# Altium PCB main.PcbDoc (part 1 of 2)
Units mil, origin at the board's own origin, x right, y up, seen from the top; angles counter-clockwise.
Board outline 5610.24 x 2755.91 mil, 4 copper layers (Top Layer, Int1 (GND), Int2 (PWR), Bottom Layer), stack 53.912 mil thick; 103 components, 58 nets, 279 pads, 77 vias.
Unrouted connection lines stored in the file: 2.
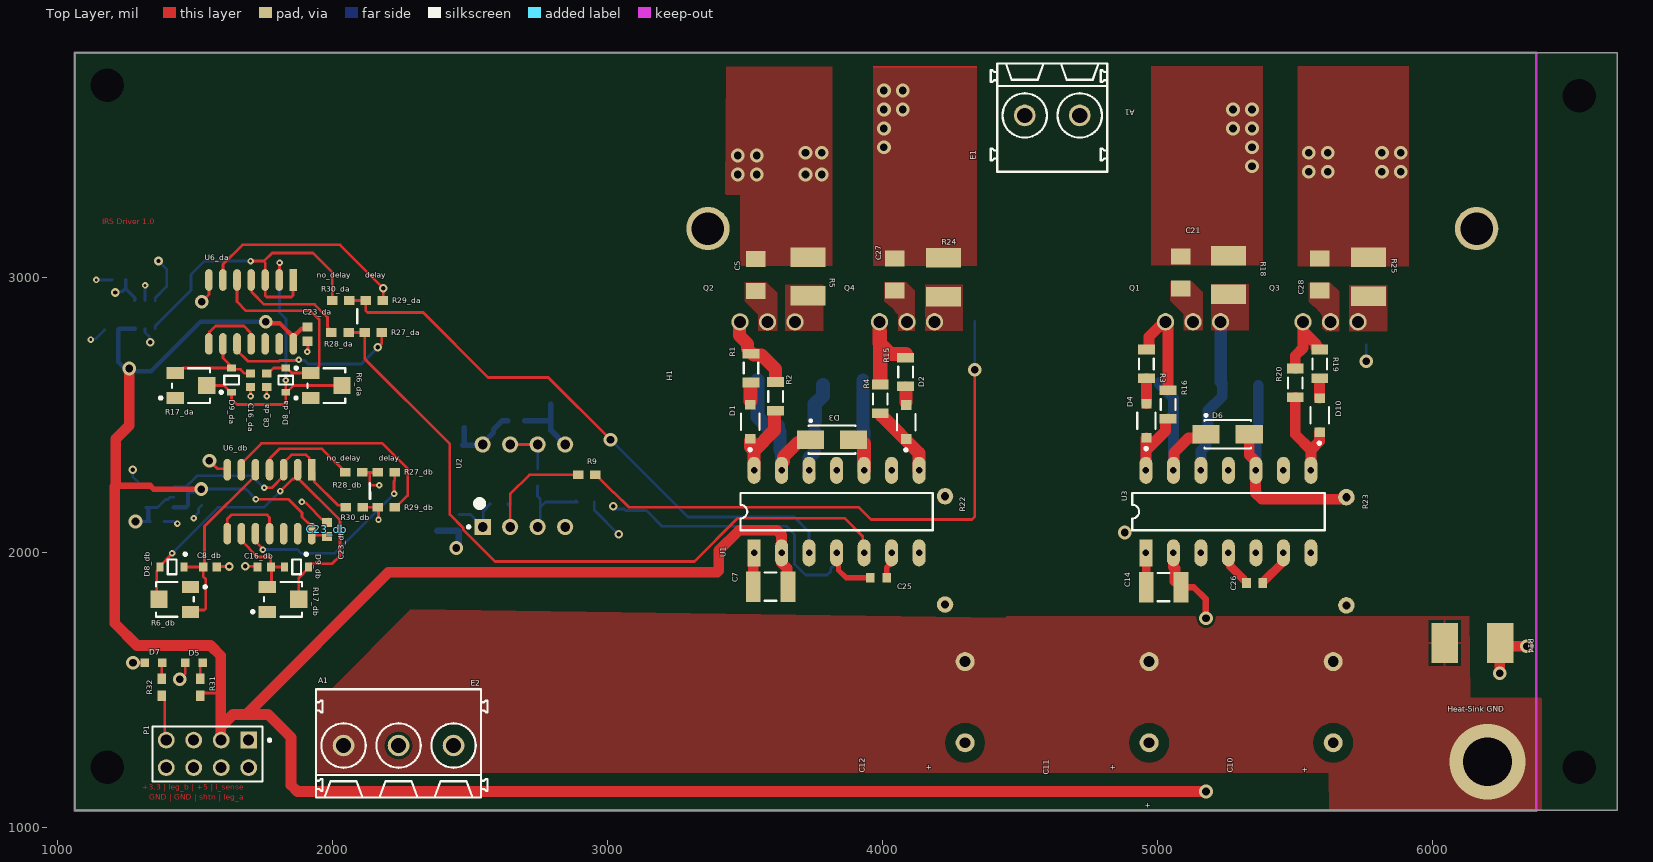
[diagram p0: Top Layer view]
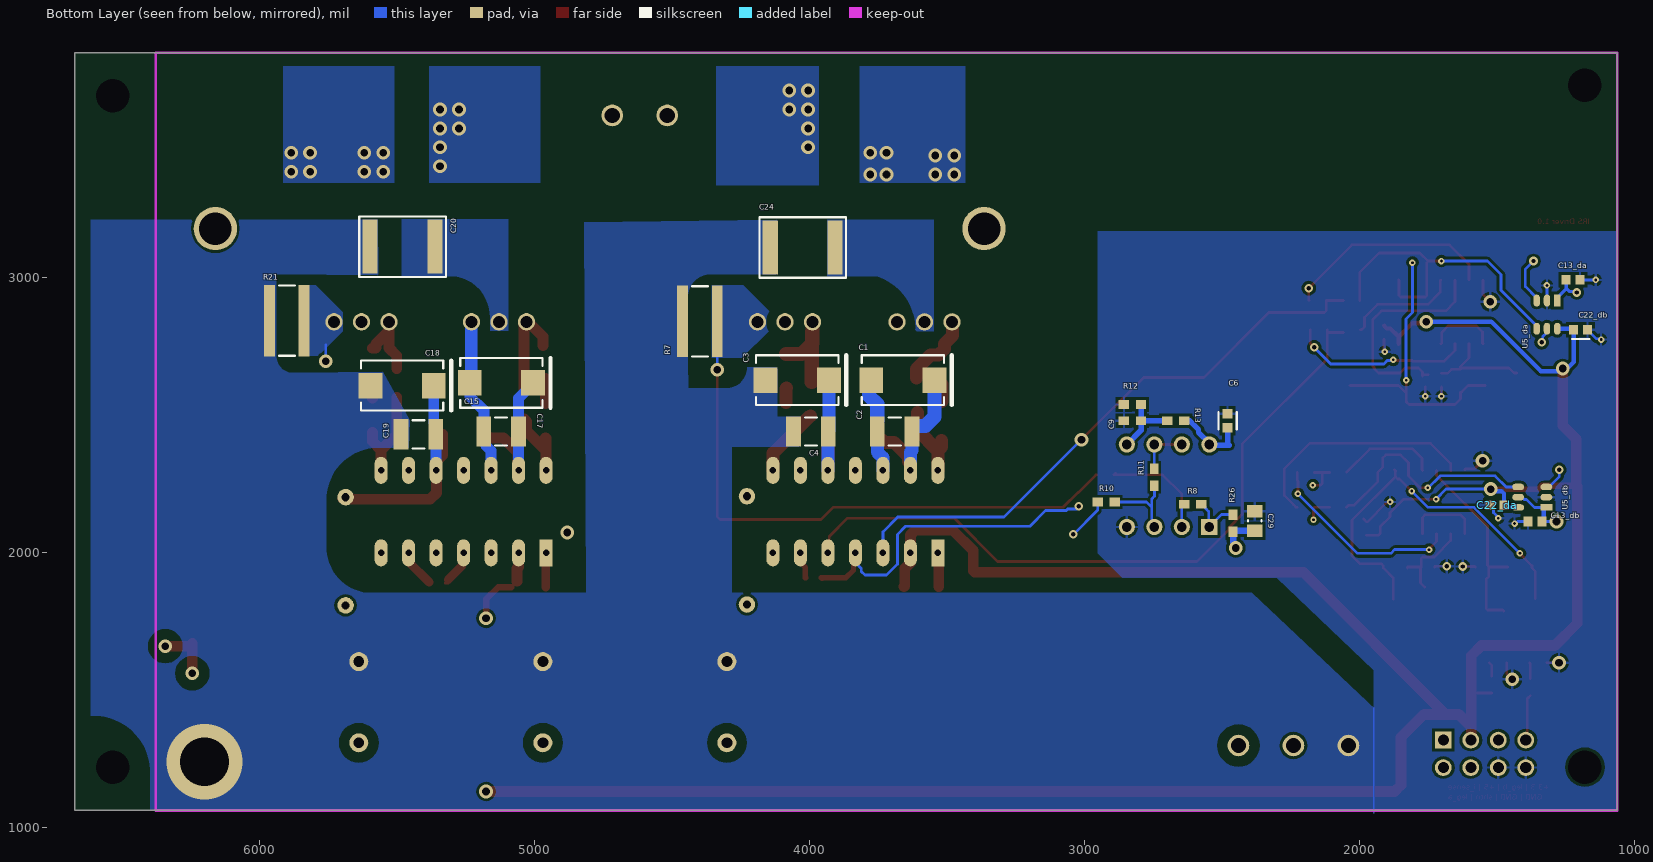
[diagram p1: Bottom Layer view, seen from below]
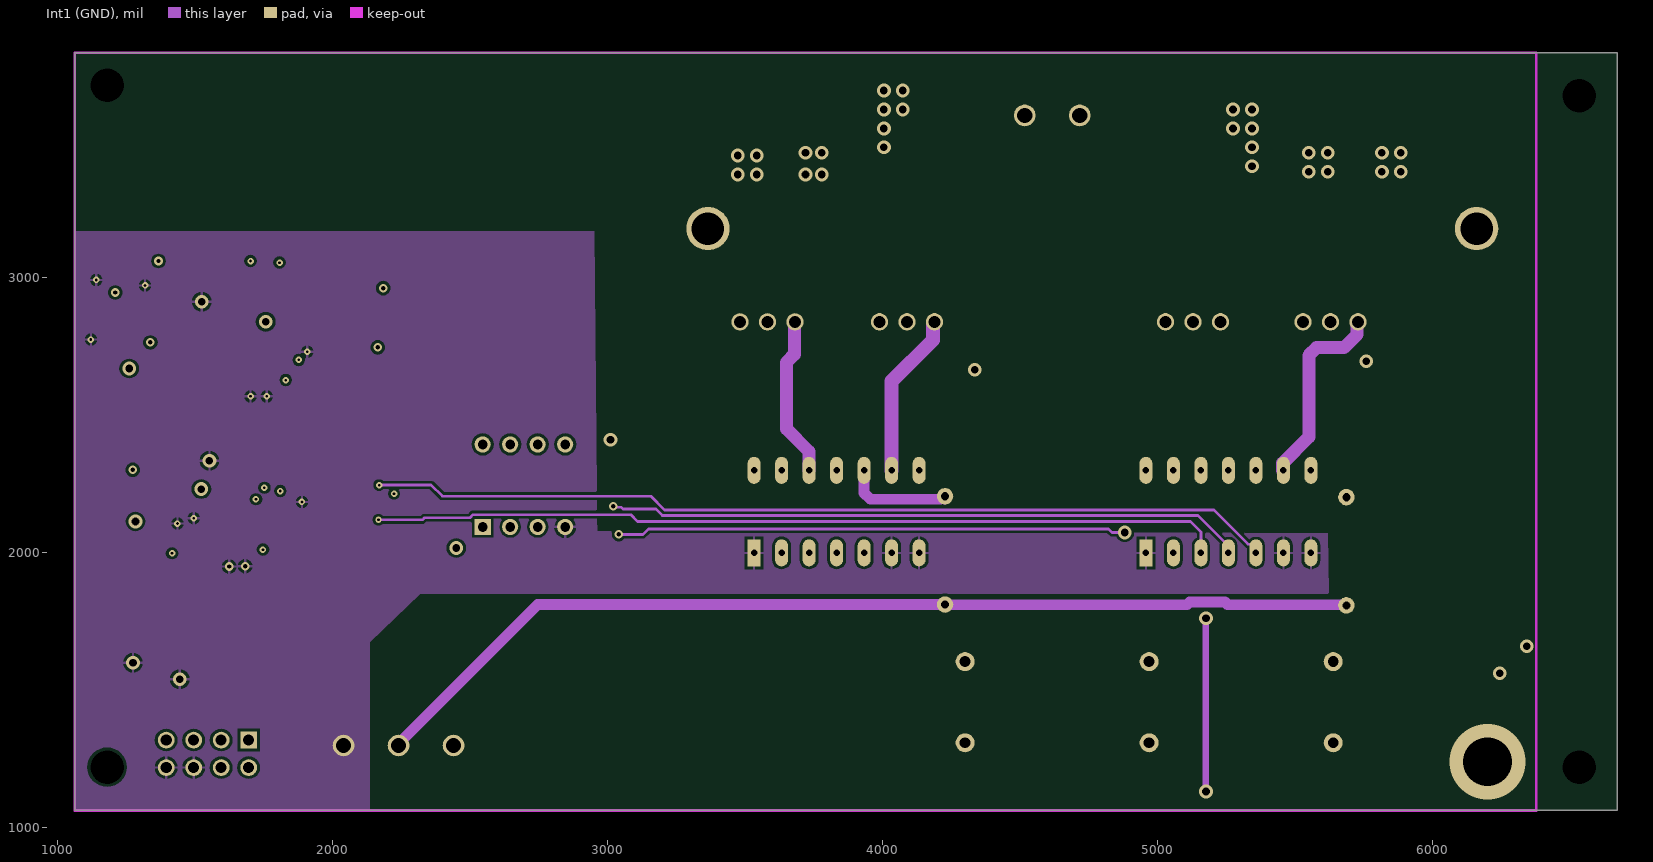
[diagram p2: Int1 (GND)]
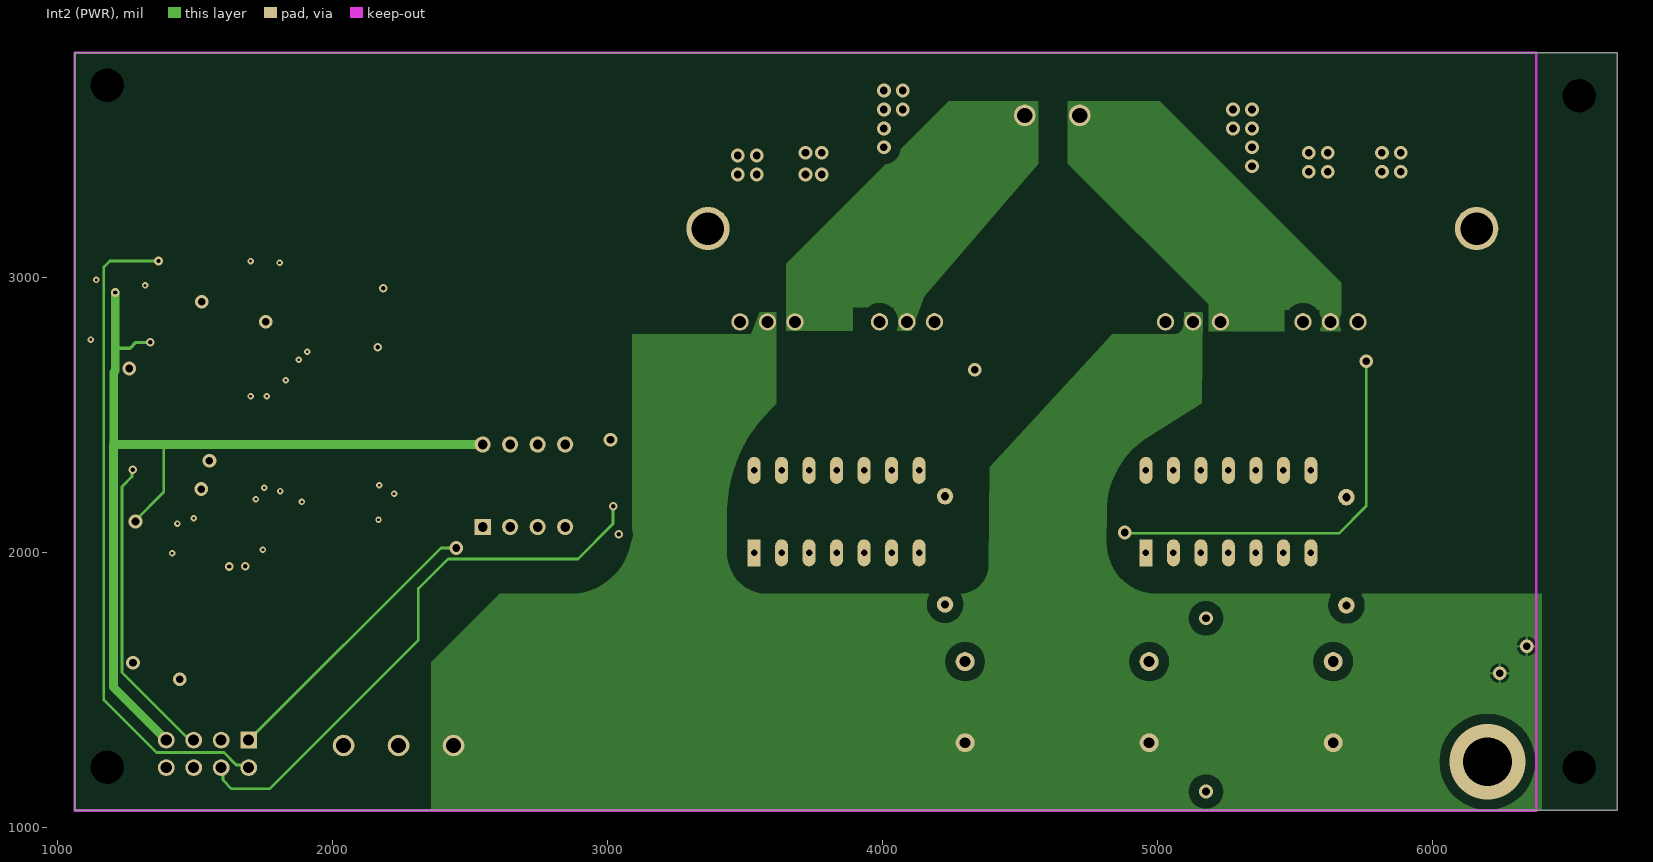
[diagram p3: Int2 (PWR)]

## Layer stack, top to bottom
Top Solder: solder mask 1, SM-001, Dk 4
Top Layer: signal copper 1.378
Dielectric 1: prepreg 5.1, PP-017, Dk 4.3
Dielectric 2: prepreg 5.1, PP-017, Dk 4.3
Int1 (GND): signal copper 1.378
Dielectric 3: core 28, Core-039, Dk 4.8
Int2 (PWR): signal copper 1.378
Dielectric 4: prepreg 5.1, PP-017, Dk 4.3
Dielectric 5: prepreg 5.1, PP-017, Dk 4.3
Bottom Layer: signal copper 1.378
Bottom Solder: solder mask 1, SM-001, Dk 4

## Board outline
1062.99,1062.99 6673.23,1062.99 6673.23,3818.9 1062.99,3818.9

## Design rules (kind name [scope] priority, off if disabled: settings)
Clearance vhigh [InNetClass('vhigh') vs Not InNetClass('vhigh')] p1: gap=37.01 ignorepadtopadclearanceinfootprint=FALSE
Clearance [All] p2: gap=10 ignorepadtopadclearanceinfootprint=FALSE except(0: Arc-Hole Track-Hole SMDPad-Hole THPad-Hole Via-Hole Fill-Hole Poly-Hole Region-Hole Text-Hole)
MinimumSolderMaskSliver [All] p1: minsoldermaskwidth=3.94
PlaneConnect direct_connect [InPadClass('direct_connect')] p1: planeconnectstyle=Direct reliefexpansion=20 reliefentries=4 reliefconductorwidth=10 reliefairgap=10
PlaneConnect [All] p2: planeconnectstyle=Relief reliefexpansion=20 reliefentries=4 reliefconductorwidth=10 reliefairgap=10
PolygonConnect direct_connect_1 [InPadClass('direct_connect')] p1: connectstyle=Direct reliefconductorwidth=10 reliefentries=4 polygonreliefangle="90 Angle" airgapwidth=10
PolygonConnect [All] p2: connectstyle=Relief reliefconductorwidth=10 reliefentries=4 polygonreliefangle="90 Angle" airgapwidth=10
RoutingVias [All] p1: holewidth=15.75 width=31.5 viastyle="Through Hole" minholewidth=9.84 minwidth=23.62 maxholewidth=39.37 maxwidth=51.18
SilkToSilkClearance [All] p1: silktosilkclearance=0.39
SilkToSolderMaskClearance [IsPad] p1: minsilkscreentomaskgap=3.94 clearancetoexposedcopper=TRUE
SolderMaskExpansion [All] p1: expansion=4 istentingtop=FALSE
Width [All] p1: maxlimit=100 minlimit=10 preferedwidth=10
26 further rules are at their usual default settings.

## Classes and differential pairs
channel class turn_on_delay: da db
component class db: C8_db C13_db C16_db C22_db C23_db D8_db D9_db R6_db R17_db R27_db R28_db R29_db R30_db U5_db U6_db
component class da: C8_da C13_da C16_da C22_da C23_da D8_da D9_da R6_da R17_da R27_da R28_da R29_da R30_da U5_da U6_da
net class vhigh: NetC1_1 NetC1_2 NetC15_1 NetC15_2 NetD1_1 NetD1_2 NetD4_1 NetD4_2 NetQ1_G NetQ2_G VH
pad class direct_connect: C3-1 C3-2 C4-1 C4-2 C5-1 C5-2 C10-1 C10-2 C11-1 C11-2 C12-1 C12-2 C18-1 C18-2 C19-1 C19-2 C20-1 C20-2 C21-1 C21-2 C24-1 C24-2 C27-1 C27-2 C28-1 C28-2 E1-A1 E1-A2 E2-A1 E2-A2 E2-A3 Q1-D Q1-G Q1-S Q2-D Q2-G Q2-S Q3-D Q3-G Q3-S Q4-D Q4-G Q4-S R2-1 R2-2 R5-1 R5-2 R7-1 R7-2 R18-1 R18-2 R21-1 R21-2 R24-1 R24-2 R25-1 R25-2
component class main: C1 C2 C3 C4 C5 C6 C7 C9 C10 C11 C12 C14 C15 C17 C18 C19 C20 C21 C24 C25 C26 C27 C28 C29 D1 D2 D3 D4 D5 D6 D7 D10 E1 E2 H1 P1 Q1 Q2 Q3 Q4 R1 R2 R3 R4 R5 R7 R8 R9 R10 R11 R12 R13 R14 R15 R16 R18 R19 R20 R21 R22 R23 R24 R25 R26 R31 R32 U1 U2 U3

## Components (designator, comment, footprint, x,y, rotation, side; value= is the part's Value field where it differs from the comment)
C1 "22uF" KEMT-D-7343-31-2_L 3661.43,2627.95 r0 bottom
C2 "3.3uF 25V" CAPC1210(3225)170_M 3690.96,2440.94 r180 bottom value=3.3uF
C3 "22uF" KEMT-D-7343-31-2_L 4045.29,2627.95 r0 bottom
C4 "3.3uF 25V" CAPC1210(3225)170_M 3996.08,2440.94 r180 bottom value=3.3uF
C5 "10nF 100V" 1206 3540.13,3010.69 r90 top
C6 "C0603X104K5RACTU" FP-C0603-CJ-MFG 2480.32,2480.32 r90 bottom value=100nF
C7 "3.3uF 25V" CAPC1210(3225)170_M 3594.02,1877.02 r0 top value=3.3uF
C8_da "GRM1885C1H100JA01D" CAPC1608X90X35LL10T15 1761.81,2627.95 r90 top (schematic designator C8)
C8_db "GRM1885C1H100JA01D" CAPC1608X90X35LL10T15 1555.12,1948.82 r180 top (schematic designator C8)
C9 "100nF" 0805 2795.28,2539.37 r0 bottom
C10 "330uF 150V" cap_electrolyte 5639.78,1456.69 r90 top locked
C11 "330uF 150V" cap_electrolyte 4970.49,1456.69 r90 top locked
C12 "330uF 150V" cap_electrolyte 4301.2,1456.69 r90 top locked
C13_da "C0603X104K5RACTU" FP-C0603-CJ-MFG 1224.16,2993 r180 bottom value=100nF (schematic designator C13)
C13_db "C0603X104K5RACTU" FP-C0603-CJ-MFG 1362.2,2114.17 r0 bottom value=100nF (schematic designator C13)
C14 "3.3uF 25V" CAPC1210(3225)170_M 5023.3,1875.06 r0 top value=3.3uF
C15 "22uF" KEMT-D-7343-31-2_L 5121.06,2618.11 r0 bottom
C16_da "GRM1885C1H100JA01D" CAPC1608X90X35LL10T15 1702.76,2627.95 r90 top (schematic designator C16)
C16_db "GRM1885C1H100JA01D" CAPC1608X90X35LL10T15 1751.97,1948.82 r0 top (schematic designator C16)
C17 "3.3uF 25V" CAPC1210(3225)170_M 5122.05,2440.94 r180 bottom value=3.3uF
C18 "22uF" KEMT-D-7343-31-2_L 5482.28,2608.27 r0 bottom
C19 "3.3uF 25V" CAPC1210(3225)170_M 5423.23,2431.1 r180 bottom value=3.3uF
C20 "3.3uF" SMD_5750 5480.83,3113.34 r0 bottom
C21 "10nF 100V" 1206 5086.31,3019.72 r90 top
C22_da "C0603X104K5RACTU" FP-C0603-CJ-MFG 1500,2173.23 r0 bottom value=100nF (schematic designator C22)
C22_db "C0603X104K5RACTU" FP-C0603-CJ-MFG 1196.85,2811.02 r180 bottom value=100nF (schematic designator C22)
C23_da "C0603X104K5RACTU" FP-C0603-CJ-MFG 1909.45,2795.28 r270 top value=100nF (schematic designator C23)
C23_db "C0603X104K5RACTU" FP-C0603-CJ-MFG 1980.51,2084.78 r90 top value=100nF (schematic designator C23)
C24 "3.3uF" SMD_5750 4025.61,3110.24 r0 bottom
C25 "CC0603KRX7R9BB103" FP-CC0603-DA-MFG 3986.22,1909.45 r0 top value="10 nF"
C26 "CC0603KRX7R9BB103" FP-CC0603-DA-MFG 5354.33,1889.76 r0 top value="10 nF"
C27 "10nF 100V" 1206 4045.28,3011.81 r90 top
C28 "10nF 100V" 1206 5590.55,3011.81 r90 top
C29 "CAP 10nF 10V 0805(2012)" CAPC0805(2012)100_N 2381.89,2116.14 r270 bottom value=10nF
D1 "B140HW-7 (1A, 40V)" FP-SOD123-MFG#1 3520.3,2476.53 r90 top value=120pF
D2 "B140HW-7 (1A, 40V)" FP-SOD123-MFG#1 4087.01,2475.48 r90 top value=120pF
D3 "US1M-13-F (1A, 1kV)" DIOD-SMA-2_A_V 3817.23,2411.42 r180 top
D4 "B140HW-7 (1A, 40V)" FP-SOD123-MFG#1 4960.63,2480.32 r90 top value=120pF
D5 "150060BS55040" LED_BLUE_0603 1505,1600 r180 top
D6 "US1M-13-F (1A, 1kV)" DIOD-SMA-2_A_V 5255.91,2431.1 r180 top
D7 "732-12014-1-ND" LED_GREEN_0603 1350,1600 r180 top
D8_da "BAT54HT1G" ONSC-SOD-323-2-477-02_V 1830.71,2627.95 r270 top (schematic designator D8)
D8_db "BAT54HT1G" ONSC-SOD-323-2-477-02_V 1417.32,1948.82 r180 top (schematic designator D8)
D9_da "BAT54HT1G" ONSC-SOD-323-2-477-02_V 1633.86,2627.95 r90 top (schematic designator D9)
D9_db "BAT54HT1G" ONSC-SOD-323-2-477-02_V 1870.08,1948.82 r180 top (schematic designator D9)
D10 "B140HW-7 (1A, 40V)" FP-SOD123-MFG#2 5590.55,2500 r90 top value=120pF
E1 "1716080000" LM_5_08_90_02 4618.11,3582.68 r180 top
E2 "1716090000" LM_5_08_90_03 2240.94,1307.09 r0 top
H1 "Heatsink" omni-uni-30-75-d 4763.78,3179.13 r180 top locked
P1 "TSW-104-08-L-D" SMTC-TSW-104-08-L-D_V 1546.06,1268.9 r180 top
Q1 "CSD19535KCS" TO-220 5130,2840 r0 top
Q2 "CSD19535KCS" TO-220 3582.5,2839.91 r0 top
Q3 "CSD19535KCS" TO-220 5630,2840 r0 top
Q4 "CSD19535KCS" TO-220 4090,2840 r0 top
R1 "3.3 1206" RESC3216X70X50LL05T20 3522.63,2671.35 r90 top
R2 "3.3 1206" RESC3216X70X50LL05T20 3612.22,2568.9 r90 top
R3 "3.3 1206" RESC3216X70X50LL05T20 4960.63,2687.01 r270 top
R4 "3.3 1206" RESC3216X70X50LL05T20 3992.57,2559.69 r90 top
R5 "4.7 2W" 2512 3730.41,3004.83 r270 top
R6_da "3313J-1-503E" BOUR-3313J-1_V 1978.35,2608.27 r0 top (schematic designator R6)
R6_db "3313J-1-503E" BOUR-3313J-1_V 1427.17,1830.71 r180 top (schematic designator R6)
R7 "33m 3W" FP-KRL6432E-M-R033-F-T1-MFG 4399.44,2841.34 r180 bottom value=33mΩ
R8 "160kOhm" 0805 2575.72,2177.09 r0 bottom
R9 "22kOhm" 0805 2893.7,2283.46 r0 top
R10 "22kOhm" 0805 2890.65,2185.04 r0 bottom
R11 "160kOhm" 0805 2747.34,2305.86 r270 bottom
R12 "5k" 0805 2857.38,2480.32 r180 bottom
R13 "5k" 0805 2699.9,2480.32 r180 bottom
R14 "CRGH2512J33K" res_bleeder 6092.91,1672.2 r0 top
R15 "3.3 1206" RESC3216X70X50LL05T20 4084.65,2657.48 r90 top
R16 "3.3 1206" RESC3216X70X50LL05T20 5039.37,2539.37 r90 top
R17_da "3313J-1-503E" BOUR-3313J-1_V 1486.22,2608.27 r0 top (schematic designator R17)
R17_db "3313J-1-503E" BOUR-3313J-1_V 1820.87,1830.71 r0 top (schematic designator R17)
R18 "4.7 2W" 2512 5259.42,3010.07 r270 top
R19 "3.3 1206" RESC3216X70X50LL05T20 5590.55,2687.01 r270 top
R20 "3.3 1206" RESC3216X70X50LL05T20 5501.97,2618.11 r90 top
R21 "33m 3W" FP-KRL6432E-M-R033-F-T1-MFG 5901.57,2844.49 r180 bottom value=33mΩ
R22 "jumper" tht_resistor_10mm 4228.33,2008.83 r90 top
R23 "jumper" tht_resistor_10mm 5687.95,2005.62 r90 top
R24 "4.7 2W" 2512 4222.44,3001.97 r270 top
R25 "4.7 2W" 2512 5767.72,3003.94 r270 top
R26 "10k 0805" 0805 2460.63,2076.77 r90 bottom
R27_da "res_smd" 0805 2180.22,2801.18 r180 top (schematic designator R27)
R27_db "res_smd" 0805 2227.46,2292.78 r180 top (schematic designator R27)
R28_da "res_smd" 0805 2059.06,2801.18 r180 top (schematic designator R28)
R28_db "res_smd" 0805 2109.35,2292.78 r180 top (schematic designator R28)
R29_da "res_smd" 0805 2184.15,2917.32 r180 top (schematic designator R29)
R29_db "res_smd" 0805 2227.46,2165.35 r180 top (schematic designator R29)
R30_da "res_smd" 0805 2062.11,2917.32 r180 top (schematic designator R30)
R30_db "res_smd" 0805 2110.24,2165.34 r180 top (schematic designator R30)
R31 "res_smd" 0805 1520,1480 r90 top
R32 "res_smd" 0805 1380,1480 r90 top
U1 "IRS2113" DIP14 3533.86,1999.71 r90 top
U2 "OPA2340PA" P0008A 2696.85,2244.09 r90 top locked
U3 "IRS2113" DIP14 4958.88,1999.71 r90 top
U5_da "TXB0101" SOT-23-6 1281.5,2917.32 r270 bottom (schematic designator U5)
U5_db "TXB0101" SOT-23-6 1321.3,2164.85 r0 bottom (schematic designator U5)
U6_da "74HC14D" SOP14_narrow 1858.27,2992.13 r270 top locked (schematic designator U6)
U6_db "74HC14D" SOP14_narrow 1925.2,2301.91 r270 top locked (schematic designator U6)
? "Comment" hex_spacer 6535.43,1220.47 r0 top
? "Comment" hex_spacer 6535.43,3661.42 r0 top
? "Comment" hex_spacer 1181.1,1220.47 r0 top
? "Comment" hex_spacer 1181.1,3700.79 r0 top

## Footprints (in the part's own frame and the unit in brackets; to place one, negate y for a bottom-side part, rotate by r counter-clockwise, add the part's x,y. Pads: shape width x height; smd on the part's side, far side on the other; paste and mask are expansions set on the pad)
0805 [mm]
  rect 0.965x0.8 smd: 1(0,0) 2(1.578,0)
  body extent -0.13,-0.64 1.78,0.64, height 0.65
1206 [mm]
  rect 1.475x1.8 smd: 1(-1.488,0) 2(1.488,0)
  body extent -1.6,-0.9 1.6,0.9, height 0.64
2512 [mm]
  rect 1.79x3.23 smd: 1(-1.79,0) 2(1.79,0)
  body extent -2.4,-1.6 2.5,1.6, height 0.64
BOUR-3313J-1_V [mm] "SMD, 3-Leads, Body 3.5x3.2mm, Pitch 1.15mm"
  rect 1.6x1.1 smd paste+0: 1(-1.45,-1.15) 3(-1.45,1.15)
  rect 1.6x1.6 smd paste+0: 2(1.45,0)
  silkscreen extent -2.92,-1.6 1.75,1.6, body extent -1.75,-1.65 1.75,1.65, height 2.11
cap_electrolyte [mm]
  round 1.75 hole 1: 1(-3.75,0) 2(3.75,0)
  body extent -8.08,-8 7.94,8, height 21.5
CAPC0805(2012)100_N [mm] "Chip Capacitor, Body 2.0x1.2mm, Height 1.0mm, IPC Medium Density"
  rect 1.15x1.45 smd: 1(-0.9,0) 2(0.9,0)
  silkscreen extent -0.05,-0.62 0.05,0.63, body extent -1.1,-0.72 1.1,0.73, height 1
CAPC1210(3225)170_M [mm] "Chip Capacitor, Body 3.2x2.5mm, Height 1.7mm, IPC Low Density"
  rect 1.35x2.8 smd: 1(-1.6,0) 2(1.6,0)
  silkscreen extent -0.55,-1.3 0.55,1.3, body extent -1.7,-1.35 1.7,1.35, height 1.7
CAPC1608X90X35LL10T15 [mm] "Chip Capacitor, 2-Leads, Body 1.60x0.80mm, IPC High Density"
  rect 0.75x0.85 smd: 1(-0.625,0) 2(0.625,0)
  body extent -0.85,-0.45 0.85,0.45, height 0.9
DIOD-SMA-2_A_V [mm] "SMA, 2-Leads, Body 4.3x2.605mm"
  rect 2.5x1.7 smd: 1(-2,0) 2(2,0)
  silkscreen extent -2.15,-1.3 2.15,1.3, body extent -2.52,-1.46 2.52,1.46, height 2.4
DIP14 [mm]
  rect 2.5x1.2 hole 0.6: 1(0,0)
  oval 2.5x1.2 hole 0.6: 2(0,-2.54) 3(0,-5.08) 4(0,-7.62) 5(0,-10.16) 6(0,-12.7) 7(0,-15.24) 8(7.62,-15.24) 9(7.62,-12.7) 10(7.62,-10.16) 11(7.62,-7.62) 12(7.62,-5.08) 13(7.62,-2.54) 14(7.62,0)
  silkscreen extent 2.08,-16.51 5.54,1.27, body extent -0.14,-16.31 7.73,1.11, height 4.7
FP-C0603-CJ-MFG [mm]
  rect 0.85x0.9 smd paste+0 mask+0: 1(-0.65,0) 2(0.65,0)
  silkscreen extent -0.8,-0.85 0.8,0.85, body extent -0.8,-0.4 0.8,0.4, height 0.95
FP-CC0603-DA-MFG [mm]
  rect 0.8x0.9 smd paste+0 mask+0: 1(-0.75,0) 2(0.75,0)
  body extent -1.35,-0.75 1.35,0.75, height 0.25
FP-KRL6432E-M-R033-F-T1-MFG [mm]
  rect 1x6.6 smd: 1(-1.6,0) 2(1.6,0)
  silkscreen extent -0.73,-3.25 0.73,3.25, body extent -1.55,-3.15 1.55,3.15, height 0.7
FP-SOD123-MFG#1 [mm]
  rect 0.9x0.95 smd: 1(-1.575,0) 2(1.575,0)
  silkscreen extent -2.7,-0.85 0.75,0.85, body extent -1.83,-0.77 1.83,0.78, height 1.45
FP-SOD123-MFG#2 [mm]
  rect 0.9x0.95 smd paste+0 mask+0: 1(-1.575,0) 2(1.575,0)
  silkscreen extent -2.7,-0.85 0.75,0.85, body extent -2.12,-0.95 2.12,0.95, height 0.25
hex_spacer [mil]
  round 60 hole 122.05: 6(0,0)
  body extent -98,-118 98,109, height 354
KEMT-D-7343-31-2_L [mm] "Molded TAN Capacitor, 2-Leads, Body 7.6x4.6mm, IPC High Density"
  rect 2.2x2.35 smd: 1(-2.925,0) 2(2.925,0)
  silkscreen extent -4.52,-2.3 3.8,2.3, body extent -3.8,-2.3 3.8,2.3, height 3.1
LED_BLUE_0603 [mm]
  rect 0.8x0.8 smd: A(-0.6,0) K(1,0)
  body extent -0.6,-0.4 1,0.4, height 0.4
LED_GREEN_0603 [mm]
  rect 0.8x0.8 smd: A(-0.8,0) K(0.8,0)
  body extent -0.8,-0.4 0.8,0.4, height 0.4
LM_5_08_90_02 [mm] "OMNIMATE Signal - Serie LM  LM 5.08/02/90 3.5"
  round 2 hole 1.4: A1(-2.54,-0.2) A2(2.54,-0.2)
  silkscreen extent -5.08,-5 5.68,5, body extent -5.08,-5 5.68,5, height 13.81
LM_5_08_90_03 [mm] "OMNIMATE Signal - Serie LM  LM 5.08/03/90 3.5"
  round 2 hole 1.4: A1(-5.08,-0.2) A2(0,-0.2) A3(5.08,-0.2)
  silkscreen extent -7.62,-5 8.22,5, body extent -7.62,-5 8.22,5, height 13.81
omni-uni-30-75-d [mm]
  round 4 hole 3: 1(-35.5,0) 2(35.5,0)
  body extent -37.5,-15 37.5,15, height 60
ONSC-SOD-323-2-477-02_V [mm] "SOD, 2-Leads, Body 1.7x1.25mm"
  rect 0.63x0.83 smd: 1(-1.115,0) 2(1.115,0)
  silkscreen extent -1.24,-0.67 0.4,1.09, body extent -0.85,-0.63 0.85,0.63, height 1.06
P0008A [mm] "DIP, 8-Leads, Body 10.15x6.6mm, Pitch 2.54mm"
  rect 1.5x1.5 hole 0.9: 1(-3.81,3.81)
  round 1.5 hole 0.9: 2(-3.81,1.27) 3(-3.81,-1.27) 4(-3.81,-3.81) 5(3.81,-3.81) 6(3.81,-1.27) 7(3.81,1.27) 8(3.81,3.81)
  silkscreen extent -3.93,3.8 -1.35,5.23, body extent -3.95,-5.07 3.95,5.07, height 5.08
res_bleeder [mm]
  rect 2.45x3.7 smd: 1(-1.225,0) 2(3.925,0)
  body extent -1.8,-1.6 4.6,1.5, height 1
RESC3216X70X50LL05T20 [mm] "Chip Resistor, 2-Leads, Body 3.20x1.60mm, IPC High Density"
  rect 0.9x1.55 smd: 1(-1.325,0) 2(1.325,0)
  silkscreen extent -0.5,-0.67 0.5,0.67, body extent -1.63,-0.82 1.62,0.82, height 0.7
SMD_5750 [mm]
  rect 1.4x5 smd: 1(-3,0) 2(3,0)
  silkscreen extent -4,-2.8 4,2.8, body extent -3.2,-2.3 3.3,2.3, height 1
SMTC-TSW-104-08-L-D_V [mm] "CONN, 8-Leads, Body 10.16x5.08mm, Pitch 2.54mm"
  rect 1.55x1.55 hole 1.02: 1(-3.81,-1.27)
  round 1.55 hole 1.02: 2(-3.81,1.27) 3(-1.27,-1.27) 4(-1.27,1.27) 5(1.27,-1.27) 6(1.27,1.27) 7(3.81,-1.27) 8(3.81,1.27)
  silkscreen extent -5.86,-2.54 5.08,2.54, body extent -5.08,-2.54 5.08,2.54, height 8.38
SOP14_narrow [mm]
  rect 2x0.7 smd: 1(0,0)
  oval 2x0.7 smd: 2(0,-1.3) 3(0,-2.6) 4(0,-3.9) 5(0,-5.2) 6(0,-6.5) 7(0,-7.8) 8(5.9,-7.8) 9(5.9,-6.5) 10(5.9,-5.2) 11(5.9,-3.9) 12(5.9,-2.6) 13(5.9,-1.3) 14(5.9,0)
  body extent 0.16,-8.22 6.14,0.43, height 1.35
SOT-23-6 [mm]
  rect 1.1x0.6 smd: 1(0,0)
  oval 1.1x0.6 smd: 2(0,-0.95) 3(0,-1.9) 4(2.6,-1.9) 5(2.6,-0.95) 6(2.6,0)
  body extent -0.12,-2.44 2.72,0.49, height 1.1
tht_resistor_10mm [mil]
  round 60 hole 30: 1(196.85,0) 2(-196.85,0)
  body extent -203,-42 203,42, height 81
TO-220 [mm]
  round 1.6 hole 1.1: D(0,0) G(-2.54,0) S(2.54,0)
  body extent -5.94,-1.75 5.94,2.65, height 19.11

## Part data
C1 C3 C15 C18: library part CMP-2000-07210-1, "Capacitor, Tantalum, 22 uF, +/- 10%, 35 V, -55 to 125 degC, 2-Pin Molded, RoHS, Tape and Reel", Capacitance=22000000pF, Case Code=D, Case Style=Molded, Manufacturer=Kemet, Operating Temp Range=-55Cto125C, Package / Case=7343-31, Package Description="2-Pin Surface Mount Device, Body 7.3 x 4.3 mm, Height 3.1 mm", Package Reference=Molded-2, Tolerance (+ or -)=10%, Voltage=35VDC, Construction=SMTChip, Datasheet URL=https://datasheet.ciiva.com/28561/1780647-28561674.pdf, Datasheet Version=12/2013, DCL=7.7uA, DF=6%, ESR=0.3ohm, Failure Rate=NotRequired, Insulation=NotRequired, Lead Spacing (nom)=NotRequiredmm, Length W/Weld=NotRequiredmm, Length W/Weld (max)=NotRequiredmm, Manufacturer URL=http://www.kemet.com/, Mounting Style=SurfaceMount, Mounting Technology=SurfaceMount, Packaging=TapeandReel, Polarity=Polar, Product Depth (mm)=4.3mm, Product Diameter (mm)=NotRequiredmm, Product Height (mm)=2.8mm, Product Length (mm)=7.3mm, Rad Hardened=No, Seal=NotRequired, Seated Plane Height=NotRequiredmm, Wire Form=NotRequired
C2 C4 C7 C14 C17 C19: library part CMP-1038-02118-1, "CAP 3.3uF 25V ±10% 1210 (3225 Metric) Thickness 1.7mm SMD", Case-EIA=1210, Case-Metric=3225, Rated Voltage="25 V", Tolerance=Â±10%, Max Thickness="1.7 mm", Technology=SMT
C5 C21 C27 C28: library part cap_smd, Supplier Part Number 1=445-2334-1-ND, Supplier 1=Digi-Key, Supplier 2=Digi-Key, Supplier 3=Digi-Key, Supplier Part Number 2=445-15417-1-ND, Supplier Part Number 3=478-1512-1-ND
C6 C13_da C13_db C22_da C22_db C23_da C23_db: library part CMP-2006-03300-2, "CAP CER 0.1UF 50V X7R 0603", Capacitance=100nF, Manufacturer=Kemet, Package=C0603-CJ, Temperature="-55°C to +125°C", Temperature Characteristic=X7R, Temperature Coefficient=15%, Temperature Range High=+125°C, Temperature Range Low=-55°C, Tolerance=10%, Voltage=50V, Automotive=No, Category=Cap, ComponentLink2Description=Datasheet, ComponentLink2URL=https://content.kemet.com/datasheets/KEM_C1013_X7R_FT-CAP_SMD.pdf, Device Class L1="Passive Components", Device Class L2=Capacitors, Device Class L3="Ceramic Capacitors", Digikey Description="CAP CER 0.1UF 50V X7R 0603", Height=0.95mm, Ipc Land Pattern Name=CAPC16080X80, Lead Free=Yes, Manufacturer Part Number=C0603X104K5RACTU, Material=Ceramic, Mouser Description="Capacitor; Ceramic; Cap 0.1uF; Tol+10%; SMT; Flexible Termination; Vol-Rtg 50V; TR", Octopart=https://octopart.com/c0603x104k5ractu-kemet-9145062, RoHS=TRUE, Voltage Rating=50V
C8_da C8_db C16_da C16_db: library part CMP-2006-02592-1, Manufacturer=Murata, Part Number=GRM1885C1H100JA01D
C9: library part cap_smd
C10 C11 C12: library part cap_electrolyte, partno=UCS2C151MHD1TN, ComponentLink1Description="Supplier Link", ComponentLink1URL=https://www.digikey.ch/product-detail/en/nichicon/UCS2C151MHD1TN/493-7378-1-ND/3768656
C20 C24: library part cap_smd, Supplier Part Number 1=445-4524-1-ND, Supplier 1=Digi-Key
C25 C26: library part CMP-2100-03600-2, "CAP CER 10000PF 50V X7R 0603", Capacitance="10 nF", Manufacturer=YAGEO, Package=CC0603-DA, Temperature="-55°C to +125°C", Temperature Characteristic=X7R, Temperature Coefficient=15%, Temperature Range High=+125°C, Temperature Range Low=-55°C, Tolerance=0.1, Voltage="50 V", Automotive=No, Category=Cap, ComponentLink2Description=Datasheet, ComponentLink2URL=http://www.yageo.com/documents/recent/UPY-GPHC_X7R_6.3V-to-50V_18.pdf, Device Class L1="Passive Components", Device Class L2=Capacitors, Device Class L3="Ceramic Capacitors", Digikey Description="CAP CER 10000PF 50V X7R 0603", Footprint Url=http://www.yageo.com/exep/pages/download/literatures/UPY-C_GEN_24.pdf, Height=0.9mm, Lead Free=Yes, Manufacturer Part Number=CC0603KRX7R9BB103, Material=Ceramic, Mouser Description="Multilayer Ceramic Capacitor, CC Series, 0.01 - F, - 10%, X7R, 50 V, 0603 [1608 Metric]", Octopart=https://octopart.com/cc0603krx7r9bb103-yageo-192938, RoHS=TRUE, Voltage Rating="50 V"
C29: library part CMP-1036-03807-1, "CAP 10nF 10V ±5% 0805 (2012 Metric) Thickness 1mm SMD", Case-EIA=0805, Case-Metric=2012, Rated Voltage="10 V", Tolerance=Â±5%, Max Thickness="1 mm", Technology=SMT
D1: library part CMP-12790-000013-1, "DIODE SCHOTTKY 40V 1A SOD123 Alternative: 1655-2275-1-ND - Cut Tape (CT)Alternative: MBRX120LF-TPMSCT-ND (20V)1655-1439-1-ND (60V)", Capacitance=120pF, Forward Current=1A, Manufacturer="Diodes Inc.", Manufacturer Part Number=B140HW-7, Max Junction Temp=+125°C, Max Repetitive Reverse Voltage=40V, Max Surge Forward Current=16A, Package=SOD123, Peak Reverse Current=40uA, Temperature="-65°C to +125°C", Temperature Range Low=-65°C, Automotive=No, Category=Diode, ComponentLink2Description=Datasheet, ComponentLink2URL=https://www.diodes.com/assets/Datasheets/ds30670.pdf, Device Class L1="Discrete Semiconductors", Device Class L2=Diodes, Device Class L3="Schottky Diodes", Digikey Description="DIODE SCHOTTKY 40V 1A SOD123", Footprint Url=https://www.diodes.com/assets/Package-Files/SOD123.pdf, Height=1.45mm, Ipc Land Pattern Name=SOD365155X110-2, Lead Free=Yes, Mouser Description="Schottky Diodes & Rectifiers SCHOTTKY RECTIFIER SOD-123 1.0A 40V", Octopart=https://octopart.com/b140hw-7-diodes+inc.-325751, Reverse Voltage=40V, RoHS=TRUE, Standoff Height=0mm, Temperature Range High=+125°C
D2 D4 D10: library part CMP-12790-000013-1, "DIODE SCHOTTKY 40V 1A SOD123 Alternative: 1655-2275-1-ND - Cut Tape (CT)", Capacitance=120pF, Forward Current=1A, Manufacturer="Diodes Inc.", Manufacturer Part Number=B140HW-7, Max Junction Temp=+125°C, Max Repetitive Reverse Voltage=40V, Max Surge Forward Current=16A, Package=SOD123, Peak Reverse Current=40uA, Temperature="-65°C to +125°C", Temperature Range Low=-65°C, Automotive=No, Category=Diode, ComponentLink2Description=Datasheet, ComponentLink2URL=https://www.diodes.com/assets/Datasheets/ds30670.pdf, Device Class L1="Discrete Semiconductors", Device Class L2=Diodes, Device Class L3="Schottky Diodes", Digikey Description="DIODE SCHOTTKY 40V 1A SOD123", Footprint Url=https://www.diodes.com/assets/Package-Files/SOD123.pdf, Height=1.45mm, Ipc Land Pattern Name=SOD365155X110-2, Lead Free=Yes, Mouser Description="Schottky Diodes & Rectifiers SCHOTTKY RECTIFIER SOD-123 1.0A 40V", Octopart=https://octopart.com/b140hw-7-diodes+inc.-325751, Reverse Voltage=40V, RoHS=TRUE, Standoff Height=0mm, Temperature Range High=+125°C
D3 D6: library part CMP-2000-07364-1, "Ultra-Fast Rectifier, 1 A, 1.7 V, -65 to 150 degC, 2-Pin SMA, RoHS, Tape and Reel", Average Rectified Current-Max=1A, Forward Voltage=1.7V, Manufacturer="Diodes Inc", Package Description="2-Pin Surface Mount Device, Body 4.3 x 2.605 mm", Package Reference=SMA-2, Reverse Current-Max=5µA, Reverse Voltage-Max [Vrrm]=1000V, Datasheet URL=http://www.diodes.com/_files/datasheets/ds16008.pdf, Datasheet Version="Rev. 11-2, 12/2014", Manufacturer URL=http://www.diodes.com/, Mounting Technology=SurfaceMount, Reverse Recovery Time-Max=75ns
D5: library part led_blue_0603, Supplier Part Number 1=732-12013-1-ND, Supplier 1=Digi-Key
D7: library part led_green_0603, Supplier 1=Digi-Key, Supplier Part Number 1=732-12014-1-ND
D8_da D8_db D9_da D9_db: library part CMP-1055-00462-1, "Schottky Barrier Diode, 2-Pin SOD-323, Pb-Free, Tape and Reel", Manufacturer="On Semiconductor", ComponentLink1Description="Manufacturer URL", ComponentLink1URL=http://www.onsemi.com/, ComponentLink2Description=Datasheet, ComponentLink2URL=http://www.onsemi.cn/pub_link/Collateral/BAT54HT1-D.PDF, ComponentLink3Description="Package Specification", ComponentLink3URL=http://www.onsemi.com/pub_link/Collateral/477-02.PDF.1, Configuration=Single, DatasheetVersion="Rev. 6", IFSM Max (A)=0.6, Mounting Technology="Surface Mount", PackageDescription="2-Pin SOD, Body 1.7 x 1.25 mm", PackageReference=SOD-323-2-477-02, PackageVersion="Rev. H, 03/2007", Packing="Tape and Reel", PartNumber=BAT54HT1G, RoHS=TRUE, trr Max (ns)=5
E1: library part CMP-1559-01766-1, "OMNIMATE Signal - series LM", Colour=Orange, Manufacturer=Weidmueller, Rated_current_use_group_B_UL_1059="15 A", Rated_voltage_for_surge_voltage_class_pollution_degree_II_2="630 V", Rated_voltage_use_group_B_UL_1059="300 V", UL_94_flammability_rating=V-0, ComponentLink1Description="Manufacturer URL", ComponentLink1URL=http://www.weidmueller.com/, ComponentLink2Description="URL Link1", ComponentLink2URL=http://catalog.weidmueller.com/catalog/Start.do?localeId=en&ObjectID=1716080000, Contact_material=Cu-Leg, Contact_surface=tinned, Insulating_material="Wemid (PA)", Mounting_onto_the_PCB="Solder connection", No_of_poles=2, PackageReference=LM_5_08_90_02, Packaging=Box, PartNumber=1716080000, Pitch_inch="0,2 inch", Pitch_mm="5,08 mm", Qty="500 PCS", Revision=V1, Short_text_for_material="LM 5.08/02/90 3.5SN OR BX", Side_termination_characteristic="closed side", Solder_pin_length_mm="3,5 mm", Solid_max_H05_07_V_U="2,5 mm²", Solid_min_H05_07_V_U="0,2 mm²", Wire_cross_section_AWG_max_UL_1059="AWG 14", Wire_cross_section_AWG_min_UL_1059="AWG 24"
E2: library part CMP-1559-01768-1, "OMNIMATE Signal - series LM", Colour=Orange, Manufacturer=Weidmueller, Rated_current_use_group_B_UL_1059="15 A", Rated_voltage_for_surge_voltage_class_pollution_degree_II_2="630 V", Rated_voltage_use_group_B_UL_1059="300 V", UL_94_flammability_rating=V-0, ComponentLink1Description="Manufacturer URL", ComponentLink1URL=http://www.weidmueller.com/, ComponentLink2Description="URL Link1", ComponentLink2URL=http://catalog.weidmueller.com/catalog/Start.do?localeId=en&ObjectID=1716090000, Contact_material=Cu-Leg, Contact_surface=tinned, Insulating_material="Wemid (PA)", Mounting_onto_the_PCB="Solder connection", No_of_poles=3, PackageReference=LM_5_08_90_03, Packaging=Box, PartNumber=1716090000, Pitch_inch="0,2 inch", Pitch_mm="5,08 mm", Qty="500 PCS", Revision=V1, Short_text_for_material="LM 5.08/03/90 3.5SN OR BX", Side_termination_characteristic="closed side", Solder_pin_length_mm="3,5 mm", Solid_max_H05_07_V_U="2,5 mm²", Solid_min_H05_07_V_U="0,2 mm²", Wire_cross_section_AWG_max_UL_1059="AWG 14", Wire_cross_section_AWG_min_UL_1059="AWG 24"
H1: Supplier Part Number 1=345-1575-ND, Supplier 1=Digi-Key
P1: library part CMP-1681-00006-4, "Male Header, Pitch 2.54 mm, 2 x 4 Position, Height 8.38 mm, Tail Length 5.08 mm, -55 to 125 degC, RoHS, Bulk", Colour=Black, Current Rating="7.6 A", Manufacturer=Samtec, Package Quantity=1, Voltage Rating="550 V", ComponentLink1Description="Manufacturer URL", ComponentLink1URL=http://www.samtec.com/, ComponentLink2Description=Datasheet, ComponentLink2URL=https://datasheet.ciiva.com/25616/0900766b81154476-25616879.pdf, ComponentLink3Description="Package Specification", ComponentLink3URL=http://suddendocs.samtec.com/prints/tsw-xxx-xx-x-x-xx-xxx-footprint.pdf, Contact Finish=Gold, Contact Material=Bronze, Contact Plating=Gold, DatasheetVersion=04/2012, Lead Pitch="0.1 inch", Mount="Through Hole", Mounting Technology="Through Hole", PackageDescription="Male Header, Pitch 2.54 mm, 2 x 4 Position, Height 8.38 mm, Tail Length 5.08 mm", PackageReference=TSW-104-08-L-D, Packaging=Bulk, Pins=8, REACH SVHC="No SVHC", RoHSCompliant=true, Rows=2
Q1 Q2 Q3 Q4: Supplier Part Number 1=296-37288-5-ND, Supplier 1=Digi-Key
R1 R2 R3 R4 R15 R16 R19 R20: library part CMP-2003-00687-1, Manufacturer=Panasonic, Part Number=ERJ-8RQF3R3V
R5 R18 R24 R25: library part res_smd, Supplier Part Number 1=CRM2512-JW-4R7ELFCT-ND, Supplier 1=Digi-Key, Supplier 2=Digi-Key, Supplier 3=Digi-Key, Supplier 4=Digi-Key, Supplier Part Number 2=CRM2512-JW-2R2ELFCT-ND, Supplier Part Number 3=CRM2512-JW-1R0ELFCT-ND, Supplier Part Number 4=CRM2512-JW-100ELFCT-ND
R6_da R6_db R17_da R17_db: library part CMP-2000-05588-1, "3 mm Trimpot(R) Trimming Potentiometer, 50 KOhm, +/- 20%, 0.125 W, -55 to 125 degC, 3-Pin SMD, RoHS, Tape and Reel", Manufacturer=Bourns, Package Description="3-Pin Surface Mount Device, Body 3.5 x 3.2 mm, Pitch 1.15 mm", Package Reference=3313J-1, Power Rating=125mW, Resistance Tolerance=±20%, Temperature Coefficient=±150ppm/°C, Track Resistance=50kohm, Datasheet URL=http://www.bourns.com/docs/Product-Datasheets/3313.pdf, Datasheet Version=05/2016, Manufacturer URL=http://www.bourns.com/, Mounting Technology=SurfaceMount, No. of Turns=1, Potentiometer Mounting=SMD, SVHC=NoSVHC(19-Dec-2012)
R7 R21: library part CMP-28537-000006-1, "RES 0.033 OHM 3W 2512 WIDE", Manufacturer=Susumu, Manufacturer Part Number=KRL6432E-M-R033-F-T1, Power Rating=3W, Resistance=33mΩ, Temperature="-55°C to +155°C", Temperature Coefficient=50ppm/°C, Temperature Range High=+155°C, Temperature Range Low=-55°C, Tolerance=1%, Automotive=Yes, Automotive Grade="Grade 0", Category=Res, ComponentLink2Description=Datasheet, ComponentLink2URL=http://www.susumu.co.jp/common/pdf/n_catalog_partition19_en.pdf, Composition="Metal Foil", Device Class L1="Passive Components", Device Class L2=Resistors, Device Class L3="Chip SMD Resistors", Digikey Description="RES 0.033 OHM 3W 2512 WIDE", Footprint Url=https://forum.upverter.com/uploads/short-url/r9IKEUF81AhWn8YVzwFFOeIy71.pdf, Height=0.7mm, Ipc Land Pattern Name=RESC310630X50, Lead Free=Yes, Mouser Description="Current Sense Resistors - SMD 3W 0.033ohm 1% 50ppm", Octopart=https://octopart.com/krl6432e-m-r033-f-t1-susumu-24927468, Package=KRL6432E-M-R033-F-T1, RoHS=TRUE, Series=KRL
R8 R9 R10 R11 R12 R13 R26: library part res_smd
R14: library part res_bleeder, "33kOhm 2W", Supplier Part Number 1=A126467CT-ND, partno=CRGH2512J33K, Supplier 1=Digi-Key
R22 R23: library part res_th
U1 U3: library part IR2113, Supplier Part Number 1=IR2113SPBFCT-ND, Supplier 1=Digi-Key
U2: library part CMP-0272-01604-3, "Single-Supply, Rail-to-Rail Operational Amplifier MicroAmplifier(TM) Series, 2.5 to 5.5 V, -40 to 85 degC, 8-pin DIP (P8), Green (RoHS & no Sb/Br)", Manufacturer="Texas Instruments", Total Supply Voltage(Max)(+5V is 5, +/-5V is 10)=5.5, Total Supply Voltage(Min)(+5V is 5, +/-5V is 10)=2.5, CMRR(Min)(dB)=80, Code_JEDEC=MS-001, ComponentLink1Description="Manufacturer URL", ComponentLink1URL=http://www.ti.com/, ComponentLink2Description=Datasheet, ComponentLink2URL=http://www.ti.com/general/docs/lit/getliterature.tsp?genericPartNumber=OPA2340&fileType=pdf, ComponentLink3Description="Package Specification", ComponentLink3URL=http://www.ti.com/litv/pdf/mpdi001b, DatasheetVersion=SBOS073B, Eco-Plan="Green (RoHS & no Sb/Br)", IIB(Max)(pA)=10, Iq per channel(Max)(mA)=0.95, Mounting Technology="Through Hole", Number of Channels=2, Offset Drift(Typ)(uV/C)=2.5, PackageDescription="8-Pin Plastic In-Line, Body 9.59 x 6.35 mm, Pitch 2.54 mm", PackageReference=P0008A, PackageVersion="4040082/E, 04/2010", PartNumber=OPA2340PA, Slew Rate(Typ)(V/us)=6, Sub Family="Low Input Bias Current Amp (<=10pA), Low Offset Voltage Amplifier (<=500uV), Low Supply Voltage Amplifier (<=2.7V), Precision Amplifier", Vio (25C)(Max)(mV)=0.5, Vn at 1kHz(Typ)(nV/rtHz)=25
U5_da U5_db: "Level Shift IC [1.2V...3.6V] -> [1.65V...5.5V]", Supplier Part Number 1=296-21664-1-ND, Supplier 1=Digi-Key
U6_da U6_db: Supplier Part Number 1=1727-2783-1-ND, Supplier 1=Digi-Key

## Via types
v1: diameter 50, hole 28, Top Layer to Bottom Layer, 45 vias
v2: diameter 23.62, hole 9.84, Top Layer to Bottom Layer, 21 vias
v3: diameter 31.5, hole 15.75, Top Layer to Bottom Layer, 10 vias
v4: diameter 275.59, hole 177.17, Top Layer to Bottom Layer, 1 vias

## Nets (pads, with @x,y where several pads share a name; then routed paths per layer and width w, separated by ;. In a path a pad name is that pad's centre, name@x,y a point inside that pad or via, vN(x,y) a via of type N, cw(c..) or ccw(c..) an arc to the next point about the centre after c; other vN are vias at no path point)
+3.3: C6.1 C13_da.1 C13_db.1 P1.7 R13.2 R32.1 U2.8 U5_da.1 U5_da.5 U5_db.1 U5_db.5 | length 4374.2
  Top Layer w10: R32.1@1380,1480 1390.75,1469.25 1390.75,1324.21 P1.7@1396.06,1318.9
  Int2 (PWR) w10: v1(1284.09,2114.17) 1284.09,2117.72 1386.92,2220.55 1386.92,2393.7
  Int2 (PWR) w11.81: 1210.54,2744.09 1264.49,2744.09 1285.56,2765.17 v3(1338.45,2765.17)
  Int2 (PWR) w31.5: v3(1210.54,2946.77) 1210.54,2744.09 1210.54,2662.45 1204.72,2656.63 1204.72,2393.7 ; P1.7@1396.06,1318.9 1204.25,1510.71 1204.25,2393.23 1204.72,2393.7 ; U2.8@2546.85,2394.09 2546.46,2393.7 1386.92,2393.7 1204.72,2393.7
  Bottom Layer w10: v1(1284.09,2114.17) 1337.6,2114.17 C13_db.1@1330.71,2121.06 ; U5_da.5@1318.9,2814.96 1318.9,2801.43 1334.34,2785.99 1334.34,2769.28 v3(1338.45,2765.17) ; U5_db.1@1321.3,2164.85 U5_db.1@1323.9,2164.85 ; U5_db.1@1330.71,2158.04 U5_db.1@1323.9,2164.85 ; U5_db.5@1423.66,2202.25 1410.13,2202.25 1401.62,2193.74 1393.27,2193.74 1364.38,2164.85 U5_db.1@1323.9,2164.85 ; 2471.9,2388.26 2474.82,2391.18 ; U2.8@2543.94,2391.18 U2.8@2546.85,2394.09
  Bottom Layer w11.81: v3(1210.54,2946.77) 1214.31,2950.53 1237.93,2950.53 1248.77,2961.37 ; C13_da.1@1248.77,2993 1248.77,2961.37 ; U5_da.1@1281.5,2917.32 1281.5,2927.17 1248.77,2959.89 1248.77,2961.37
  Bottom Layer w15.75: C13_db.1@1330.71,2121.06 U5_db.1@1330.71,2158.04
  Bottom Layer w19.68: 2474.82,2391.18 2480.32,2391.18 ; C6.1@2480.32,2454.72 2480.32,2391.18 ; U2.8@2543.94,2391.18 2480.32,2391.18 ; U2.8@2546.85,2394.09 2546.85,2398.82 2586.25,2438.21 2586.25,2448.45 2618.11,2480.32 R13.2@2637.8,2480.32
+5: C7.2 C14.2 C22_da.1 C22_db.1 C23_da.1 C23_db.1 P1.3 R31.1 U1.2 U3.2 U5_da.6 U5_db.6 U6_da.14 U6_db.14 | length 11034
  Top Layer w10: R31.1@1520,1490 1589.49,1490 1594.49,1485 ; v2(1722.44,2194.88) 1840.55,2194.88 1889.76,2145.67 1889.76,2130.65 1925.2,2095.21 U6_db.14@1925.2,2069.62 1931.26,2063.55 C23_db.1@1975.13,2063.55 ; U3.2@5058.88,1999.71 U3.2@5059.06,1999.54 ; C14.2@5064.71,1896.63 C14.2@5086.29,1875.06
  Top Layer w15.75: v1(1757.69,2840.05) 1763.51,2834.24 1809.46,2834.24 1817.34,2826.36 U6_da.14@1858.27,2785.43 ; U6_da.14@1858.27,2759.84 U6_da.14@1858.27,2785.43 ; C23_da.1@1911.18,2825.63 1901.41,2815.87 1888.7,2815.87 U6_da.14@1858.27,2785.43
  Top Layer w19.68: 1337.83,2244.09 1350.27,2231.65 v1(1523.62,2231.65)
  Top Layer w23.62: 1212.6,2244.09 1337.83,2244.09 ; C14.2@5086.29,1875.06 5132.82,1875.06 5177.17,1830.71 v1(5177.17,1761.81)
  Top Layer w39.37: v1(1261.29,2670) 1261.29,2462.95 1212.6,2414.25 1212.6,2244.09 1208.66,2240.16 1208.66,1744.09 1289.37,1663.39 1556.61,1663.39 1594.49,1625.51 1594.49,1485 1594.49,1320.47 P1.3@1596.06,1318.9 ; 1604.33,1377.95 1638.78,1412.4 1687.99,1412.4 ; C7.2@3657.01,1877.02 3654.6,1879.43 3654.6,1943.3 3633.86,1964.04 U1.2@3633.86,1999.71 3633.86,2064.96 3616.91,2081.91 3479.55,2081.91 3405.51,2007.87 3405.51,1934.99 3399.65,1929.13 2204.72,1929.13 1687.99,1412.4 ; U3.2@5059.06,1999.54 5059.06,1948.82 5064.71,1943.16 C14.2@5064.71,1896.63 ; v1(5177.17,1131.89) 1873.46,1131.89 1850.39,1154.95 1850.39,1328.74 1766.73,1412.4 1687.99,1412.4
  Int1 (GND) w23.62: v1(5177.17,1131.89) v1(5177.17,1761.81)
  Bottom Layer w10: v1(1523.62,2231.65) 1685.67,2231.65 v2(1722.44,2194.88)
  Bottom Layer w15.75: v1(1261.29,2670) 1261.29,2665.82 v1@1255.47,2660 ; U5_da.6@1281.5,2814.96 1225.39,2814.96 1221.46,2811.02 1221.46,2694.02 v1@1255.47,2660 ; U5_db.6@1423.66,2164.85 1424.16,2165.35 1467.52,2165.35 1475.39,2173.23 1475.39,2215.55 1483.84,2224 1515.97,2224 v1(1523.62,2231.65) ; v1(1757.69,2840.05) 1521.15,2840.05 1341.1,2660 v1@1255.47,2660
+12: C3.1 C4.2 C18.1 C19.2 D3.1 D6.1 E2.A2 R22.1 R22.2 R23.1 R23.2 U1.10 U3.10 | length 5359.1
  Top Layer w10: U3.10@5358.88,2299.71 U3.10@5358.88,2331.45
  Top Layer w39.37: D6.1@5334.65,2431.1 5334.65,2355.69 U3.10@5358.88,2331.45 ; U3.10@5358.88,2299.71 5357.38,2298.21 5357.38,2217.94 5380.44,2194.88 5665.77,2194.88 5669.42,2198.53 5696.39,2198.53 R23.1@5696.94,2197.98
  Top Layer w51.18: U1.10@3933.99,2299.85 D3.1@3933.99,2397.64
  Int1 (GND) w10: R22.2@4228.33,1811.98 4229.93,1810.37 R22.2@4230.58,1811.02 ; R23.2@5685.7,1811.02 R23.2@5687.95,1808.77
  Int1 (GND) w39.37: E2.A2@2249.06,1314.02 2747.02,1811.98 R22.2@4228.33,1811.98 ; U1.10@3933.86,2299.71 3933.86,2217.74 3956.92,2194.68 4211.75,2194.68 4218.8,2201.73 4221.17,2201.73 R22.1@4226.76,2196.15 ; R22.2@4230.58,1811.02 5108.27,1811.02 5118.11,1820.87 5246.06,1820.87 5255.91,1811.02 R23.2@5685.7,1811.02
  Bottom Layer w10: C19.2@5358.88,2429.75 C19.2@5360.24,2431.1 5360.24,2466.54 C19.2@5367.13,2473.43
  Bottom Layer w39.37: U3.10@5358.88,2299.71 C19.2@5358.88,2429.75 ; C19.2@5367.13,2473.43 C18.1@5367.13,2608.27
  Bottom Layer w47.24: C3.1@3930.13,2627.95 3930.13,2443.9 C4.2@3933.09,2440.95 3933.86,2440.17 U1.10@3933.86,2299.71